# Altium PCB radxa_cm3_io_board_v1330.PcbDoc (part 4 of 8)
Units mil, origin at the board's own origin, x right, y up, seen from the top; angles counter-clockwise.
Board outline 6299.61 x 3544.09 mil, 4 copper layers (Top, GND, Power, Bottom), stack 35.4 mil thick; 547 components, 411 nets, 1952 pads, 2650 vias.
Unrouted connection lines stored in the file: 280.
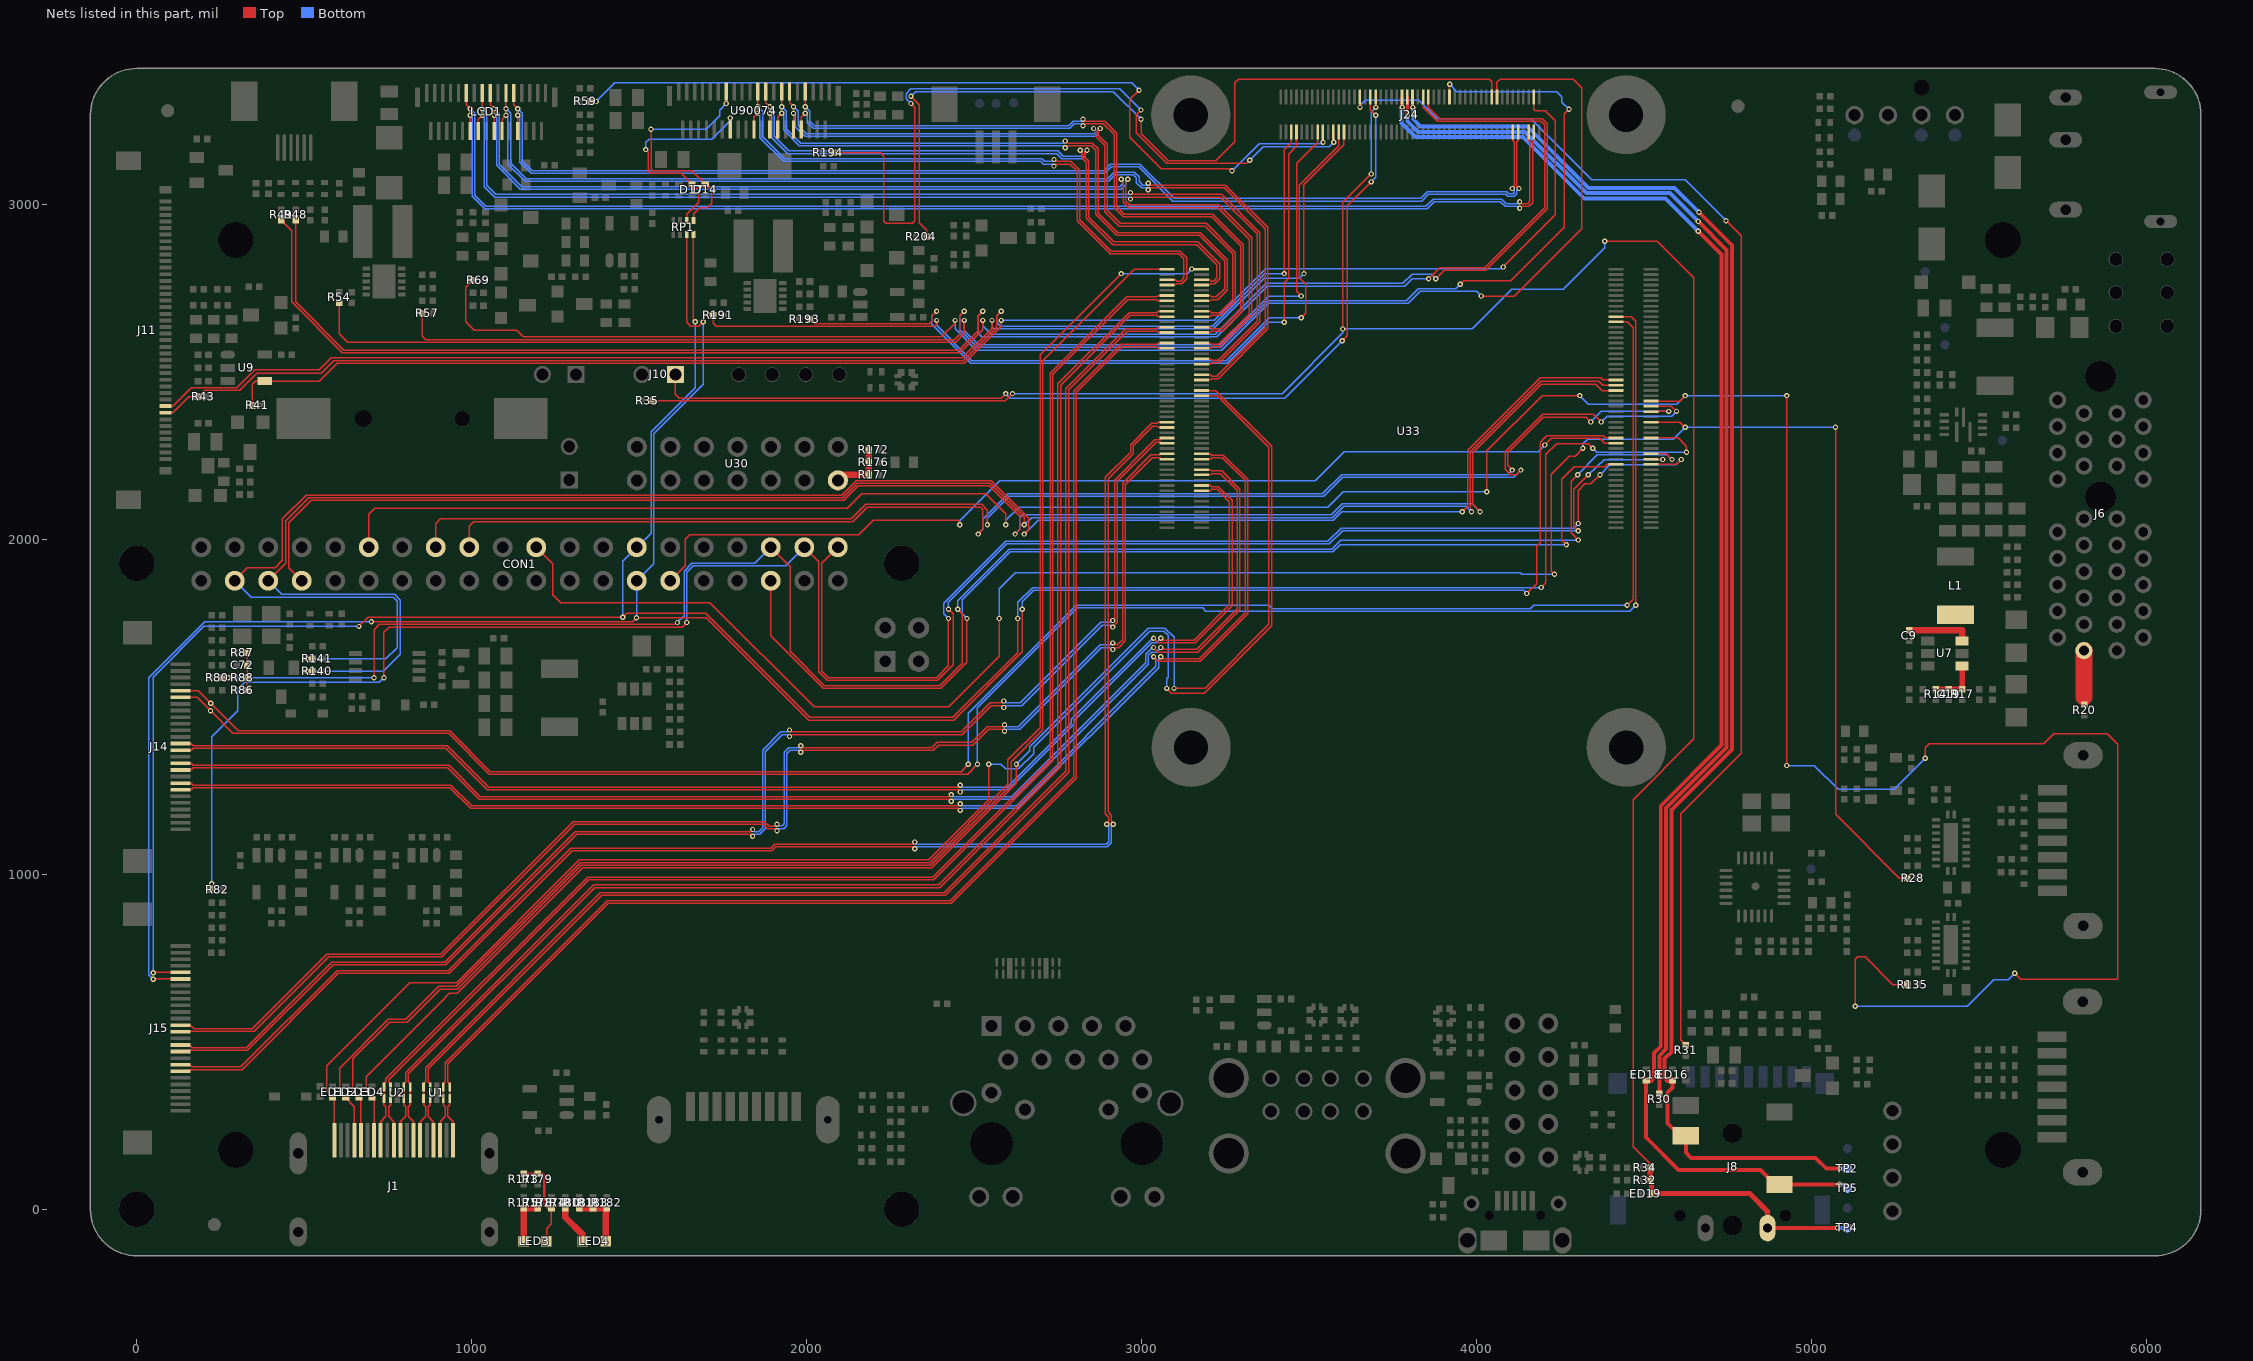
[diagram p6: the nets of this part, all layers, seen from the top]

## Via types
v1: diameter 15.75, hole 7.87, Top to Bottom, 2618 vias
v2: diameter 19.68, hole 11.81, Top to Bottom, 32 vias

## Nets (pads, with @x,y where several pads share a name; then routed paths per layer and width w, separated by ;. In a path a pad name is that pad's centre, name@x,y a point inside that pad or via, vN(x,y) a via of type N, cw(c..) or ccw(c..) an arc to the next point about the centre after c; other vN are vias at no path point) (continued)
HDMI_TX0N_PORT: J1.9 U2.2 U2.9 U33.184 | length 4093.4
  Top w3.94: J1.9@787.41,206.69 787.41,261.82 803.15,277.56 803.15,307.08 797.24,312.99 U2.9@797.24,331.21 U2.2@797.24,365.65 797.24,375 803.15,380.9 803.15,407.48 1364.17,968.5 2394.38,968.5 2750,1324.13 2750,2463.89 2962.68,2676.57 3045.28,2676.57 3049.21,2680.51 U33.184@3075.2,2680.51
HDMI_TX0P_PORT: J1.7 U2.1 U2.10 U33.182 | length 4080.4
  Top w3.94: J1.7@826.78,206.69 826.78,261.81 811.03,277.55 811.03,307.09 816.93,312.99 U2.10@816.93,331.21 U2.1@816.93,365.65 816.93,375 811.02,380.9 811.02,404.22 1367.43,960.63 2397.64,960.63 2757.87,1320.87 2757.87,2460.63 2965.94,2668.7 3045.28,2668.7 3049.21,2664.76 U33.182@3075.2,2664.76
HDMI_TX1N_PORT: J1.6 U1.5 U1.6 U33.178 | length 4024.8
  Top w3.94: J1.6@846.46,206.69 846.46,261.81 862.2,277.56 862.2,307.09 856.3,312.99 U1.6@856.3,331.21 U1.5@856.3,365.65 856.3,375 862.21,380.9 862.21,422.55 1384.54,944.88 2410.12,944.88 2773.62,1308.38 2773.62,2450.11 2952.84,2629.33 3045.28,2629.33 3049.21,2633.27 U33.178@3075.2,2633.27
HDMI_TX1P_PORT: J1.4 U1.4 U1.7 U33.176 | length 4011.7
  Top w3.94: J1.4@885.83,206.69 885.83,261.81 870.08,277.56 870.08,307.09 875.98,312.99 U1.7@875.99,331.21 U1.4@875.99,365.65 875.99,375 870.08,380.9 870.08,419.29 1387.8,937.01 2413.39,937.01 2781.5,1305.12 2781.5,2446.85 2956.1,2621.46 3045.28,2621.46 3049.21,2617.52 U33.176@3075.2,2617.52
HDMI_TX2N_PORT: J1.3 U1.2 U1.9 U33.172 | length 3960.9
  Top w3.94: J1.3@905.52,206.69 905.52,261.82 921.26,277.56 921.26,307.08 915.35,313 U1.9@915.35,331.21 U1.2@915.35,365.65 915.35,375 921.26,380.9 921.26,438.1 1404.42,921.26 2427.84,921.26 2797.24,1290.66 2797.24,2442.04 2937.29,2582.09 3045.28,2582.09 3049.21,2586.02 U33.172@3075.2,2586.02
HDMI_TX2P_PORT: J1.1 U1.1 U1.10 U33.170 | length 3947.9
  Top w3.94: J1.1@944.89,206.69 944.89,261.81 929.14,277.55 929.14,307.09 935.04,312.99 U1.10@935.04,331.21 U1.1@935.04,365.65 935.04,375 929.13,380.9 929.13,434.84 1407.68,913.39 2431.1,913.39 2805.12,1287.4 2805.12,2438.78 2940.55,2574.21 3045.28,2574.21 3049.21,2570.28 U33.170@3075.2,2570.28
HDMI_TX_CEC_PORT: ED4.1 J1.13 U33.151 | length 4526.3
  Top w3.94: J1.13@708.67,206.69 708.67,326.77 ED4.1@702.76,332.68 696.85,338.58 693.92,338.58 693.92,347.42 685.04,356.3 685.04,395.87 923.03,633.86 923.03,635.15 933.07,645.19 956.58,645.19 1331.08,1019.68 2374.02,1019.68 2625.98,1271.65 v1(2625.98,1328.74) ; v1(3096.46,1555.12) 3188.98,1555.12 3379.92,1746.06 3379.92,2274.3 3225.68,2428.54 U33.151@3179.13,2428.54
  Bottom w3.94: v1(2625.98,1328.74) 2665.88,1368.64 2665.88,1380.45 3019.69,1734.25 3069.32,1734.25 3096.46,1707.11 v1(3096.46,1555.12)
HDMI_TX_HPD_PORT: ED1.1 J1.19 U33.153 | length 4748.7
  Top w3.94: J1.19@590.56,206.69 590.56,326.77 ED1.1@584.65,332.68 578.74,338.58 575.81,338.58 575.81,347.42 566.93,356.3 566.93,429.13 814.96,677.17 955.06,677.17 1321.2,1043.31 2364.23,1043.31 2543.31,1222.38 v1(2543.31,1328.74) ; v1(3074.8,1555.12) 3088.58,1541.34 3187.01,1541.34 3387.8,1742.13 3387.8,2277.56 3221.06,2444.29 U33.153@3179.13,2444.29
  Bottom w3.94: v1(2543.31,1328.74) 2579.82,1328.74 2593.6,1314.96 2631.69,1314.96 2677.17,1360.43 2677.17,1379.92 3023.62,1726.38 3066.06,1726.38 3078.74,1713.69 3078.74,1588.58 3074.8,1584.64 v1(3074.8,1555.12)
HDMI_TXCLKN_PORT: J1.12 U2.5 U2.6 U33.190 | length 4170.1
  Top w3.94: J1.12@728.35,206.69 728.35,261.81 744.09,277.56 744.09,307.09 738.19,312.99 U2.6@738.19,331.21 U2.5@738.19,365.65 738.19,375 744.1,380.9 744.1,390.41 1345.81,992.13 2376.66,992.13 2726.38,1341.84 2726.38,2495.39 2954.81,2723.82 3045.28,2723.82 3049.21,2727.76 U33.190@3075.2,2727.76
HDMI_TXCLKP_PORT: J1.10 U2.4 U2.7 U33.188 | length 4157.1
  Top w3.94: J1.10@767.72,206.69 767.72,261.81 751.97,277.56 751.97,307.09 757.87,312.99 U2.7@757.88,331.21 U2.4@757.88,365.65 757.88,375 751.97,380.9 751.97,387.15 1349.08,984.25 2379.92,984.25 2734.25,1338.58 2734.25,2492.13 2958.07,2715.94 3045.28,2715.94 3049.21,2712.01 U33.188@3075.2,2712.01
HDMI_TXDDC_SCL_PORT: ED3.1 J1.15 U33.200 | length 4346.8
  Top w3.94: J1.15@669.3,206.69 669.3,326.77 ED3.1@663.39,332.68 657.48,338.58 654.55,338.58 654.55,347.42 645.67,356.3 645.67,449.91 754.81,559.06 807.09,559.06 905.51,657.48 957.71,657.48 1327.79,1027.56 2370.75,1027.56 2610.24,1267.04 2610.24,1336.5 2704.72,1430.99 2704.72,2533.27 2977.95,2806.5 U33.200@3075.2,2806.5
HDMI_TXDDC_SDA_PORT: ED2.1 J1.16 U33.199 | length 4490.8
  Top w3.94: J1.16@649.61,206.69 649.61,307.09 ED2.1@624.02,332.68 618.11,338.58 615.18,338.58 615.18,347.42 606.3,356.3 606.3,421.68 751.55,566.93 803.83,566.93 902.25,665.35 954.42,665.35 1324.5,1035.43 2367.49,1035.43 2600.39,1268.33 2600.39,1341.82 2696.85,1438.27 2696.85,2551.18 v1(2938.98,2793.31) ; v1(3149.61,2807.09) 3178.54,2807.09 U33.199@3179.13,2806.5
  Bottom w3.94: v1(2938.98,2793.31) 3135.83,2793.31 v1(3149.61,2807.09)
HP_DET_L_GPIO4_C4: J24.70 R31.2 | length 3846
  Top w3.94: J24.70@3650.98,3320.08 3651.57,3319.49 v1(3651.57,3289.37) ; R31.2@4624.02,490.16 4608.27,505.91 4608.27,1167.32 4608.27,1180.31 4789.37,1361.41 4789.37,2905.51 v1(4744.09,2950.79)
  Bottom w3.94: v1(3651.57,3289.37) 3651.57,3295.28 3667.32,3311.02 3826.77,3311.02 3881.89,3255.91 4160.63,3255.91 4343.7,3072.83 4622.05,3072.83 v1(4744.09,2950.79)
HP_SNS: J24.52 R30.2 | length 3786.9
  Top w7.87: J24.52@3792.72,3320.08 3793.31,3319.49 v1(3793.31,3265.75)
  Top w11.81: R30.2@4545.28,344.49 4545.28,458.66 4564.96,478.35 4564.96,1198.25 4746.06,1379.35 4746.06,2864.17 v1(4661.42,2948.82)
  Bottom w11.81: v1(3793.31,3265.75) 3793.31,3248.03 3824.8,3216.54 4144.32,3216.54 4327.39,3033.46 4576.77,3033.46 v1(4661.42,2948.82)
HPL_OUT: ED16.1 J8.3 J24.50 TP2.1 | length 4524.8
  Top w7.87: J24.50@3808.46,3320.08 3808.46,3305.12 v1(3809.06,3289.37)
  Top w11.81: v1(4663.39,2976.38) 4761.81,2877.95 4761.81,1372.83 4580.71,1191.73 4580.71,470.47 4561.02,450.79 4561.02,391.73 4568.9,383.86 ED16.1@4584.65,383.86 4584.65,364.17 4569.69,349.21 4569.69,257.09 4607.09,219.68 J8.3@4624.02,219.68 4624.02,169.29 4639.76,153.54 5011.81,153.54 5043.31,122.05 v1(5082.68,122.05)
  Bottom w11.81: v1(3809.06,3289.37) 3811.02,3287.4 3811.02,3253.94 3832.68,3232.28 4150.84,3232.28 4333.91,3049.21 4590.55,3049.21 v1(4663.39,2976.38) ; v1(5082.68,122.05) TP2.1@5106.3,122.05
HPR_OUT: ED18.1 J8.6 J24.54 TP5.1 | length 4597.8
  Top w7.87: J24.54@3776.97,3320.08 3776.97,3297.24 v1(3777.56,3289.37)
  Top w11.81: v1(4661.42,2919.29) 4730.31,2850.39 4730.31,1385.87 4549.21,1204.77 4549.21,486.22 4529.53,466.54 4529.53,391.73 4521.65,383.86 ED18.1@4505.91,383.86 4505.91,214.57 4602.36,118.11 4846.39,118.11 4889.76,74.02 J8.6@4903.54,74.02 4904.33,74.8 v1(5082.68,74.8)
  Bottom w11.81: v1(3777.56,3289.37) 3775.59,3287.4 3775.59,3242.13 3816.93,3200.79 4137.8,3200.79 4320.87,3017.72 4562.99,3017.72 v1(4661.42,2919.29) ; v1(5082.68,74.8) 5094.49,74.8 TP5.1@5106.3,62.99
I2C0_SCL_PMIC: J14.5 U33.80 | length 5614.5
  Top w3.94: J14.5@131.1,1548.04 184.25,1548.04 v1(221.46,1510.83) 303.15,1429.13 934.17,1429.13 1056.21,1307.09 2460.63,1307.09 v1(2482.28,1328.74) ; U33.80@4415.75,2649.02 4449.41,2649.02 4466.54,2631.89 4466.54,1820.87 v1(4448.82,1803.15)
  Bottom w3.94: v1(2482.28,1328.74) 2482.28,1481.41 2804.02,1803.15 3379.86,1803.15 3389.71,1793.31 4160.33,1793.31 4170.18,1803.15 v1(4448.82,1803.15)
I2C0_SDA_PMIC: J14.6 U33.82 | length 5666.4
  Top w3.94: J14.6@131.1,1528.35 180.32,1528.35 v1(220.47,1488.19) 287.4,1421.26 930.9,1421.26 1052.95,1299.21 2480.31,1299.21 v1(2509.84,1328.74) ; U33.82@4415.75,2664.76 4460.63,2664.76 4474.41,2650.98 v1(4474.41,1803.15)
  Bottom w3.94: v1(2509.84,1328.74) 2509.84,1497.83 2807.28,1795.28 3181.83,1795.28 3191.68,1785.43 4456.69,1785.43 v1(4474.41,1803.15)
I2C2_SCL_LCD: D14.1 RP1.4 U90074.27 | length 754.3
  Top w3.94: v1(1535.43,3224.41) 1535.43,3104.33 1539.37,3100.39 1657.48,3100.39 D14.1@1696.85,3061.02 1716.54,3041.34 1716.54,3003.94 1702.76,2990.16 1681.1,2990.16 1663.39,2972.44 1663.39,2953.1 RP1.4@1661.89,2951.6 ; v1(1759.84,3301.18) U90074.27@1759.84,3336.61
  Bottom w3.94: v1(1535.43,3224.41) 1700.79,3224.41 1740.16,3263.78 1740.16,3281.5 v1(1759.84,3301.18)
I2C2_SCL_M1: CON1.28 J15.5 RP1.5 U33.35 | length 7781.7
  Top w3.94: v1(49.21,706.69) 50,707.48 J15.5@131.1,707.48 ; v1(663.39,1740.16) 690.94,1767.72 v1(1450.79,1767.72) 1462.6,1779.53 1698.14,1779.53 2009.17,1468.5 2436.39,1468.5 2629.92,1662.03 v1(2629.92,1763.78) ; RP1.5@1661.89,2910.6 1661.89,2653.54 1667.32,2648.11 v1(1667.32,2649.61) ; v1(4192.91,1856.3) 4206.69,1870.08 4206.69,2253.94 4238.19,2285.43 4332.68,2285.43 v1(4346.46,2271.65) ; U33.35@4520.47,2302.56 4600.98,2302.56 4625.98,2277.56 v1(4625.98,2259.84)
  Bottom w3.94: v1(49.21,706.69) 49.21,1588.58 200.79,1740.16 v1(663.39,1740.16) ; v1(1450.79,1767.72) 1450.79,1934.25 CON1.28@1492.91,1976.38 1535.43,2018.9 1535.43,2320.87 1667.32,2452.76 v1(1667.32,2649.61) ; v1(2629.92,1763.78) 2629.92,1811.7 2674.52,1856.3 v1(4192.91,1856.3) ; v1(4346.46,2271.65) 4358.27,2259.84 v1(4625.98,2259.84)
I2C2_SCL_MO: CON1.5 R140.1 U33.56 | length 5484.7
  Top w3.94: CON1.5@392.91,1876.38 444.88,1928.35 444.88,2055.12 513.78,2124.02 2107.59,2124.02 2150.9,2167.32 2547.92,2167.32 2649.61,2065.64 v1(2649.61,2043.31) ; v1(507.87,1606.3) R140.1@523.62,1606.3 ; v1(3984.25,2082.68) 3980.31,2086.61 3980.31,2261.81 4190.94,2472.44 4363.58,2472.44 4375.98,2460.04 U33.56@4415.75,2460.04
  Bottom w3.94: CON1.5@392.91,1876.38 432.68,1836.61 769.69,1836.61 787.4,1818.9 787.4,1657.48 736.22,1606.3 v1(507.87,1606.3) ; v1(2649.61,2043.31) 2671.26,2064.96 3568.96,2064.96 3602.42,2098.43 3968.5,2098.43 v1(3984.25,2082.68)
I2C2_SDA_LCD: D17.1 RP1.3 U90074.26 | length 688.7
  Top w3.94: v1(1519.69,3163.39) 1527.56,3155.51 1527.56,3098.43 1533.46,3092.52 1625.98,3092.52 D17.1@1657.48,3061.02 1677.17,3041.34 1677.17,3005.91 1641.89,2970.63 RP1.3@1641.89,2951.6 ; U90074.26@1771.65,3223.43 v1(1771.65,3257.87)
  Bottom w3.94: v1(1519.69,3163.39) 1519.69,3185.04 1529.53,3194.88 1716.54,3194.88 1771.65,3250 v1(1771.65,3257.87)
I2C2_SDA_M1: CON1.27 J15.6 RP1.6 U33.36 | length 7548.3
  Top w3.94: v1(49.21,687.01) 50,687.79 J15.6@131.1,687.79 ; v1(700.79,1753.94) 1480.31,1753.94 v1(1492.13,1765.75) 1700.79,1765.75 2005.91,1460.63 2439.65,1460.63 2643.7,1664.68 v1(2643.7,1791.34) ; RP1.6@1641.89,2910.6 1641.89,2647.48 1653.54,2635.83 1677.17,2635.83 v1(1690.94,2649.61) ; v1(4149.61,1838.58) 4179.13,1868.11 4179.13,1980.31 4188.98,1990.16 4188.98,2289.37 4208.66,2309.06 4377.36,2309.06 4383.86,2302.56 U33.36@4415.75,2302.56
  Bottom w3.94: v1(49.21,687.01) 35.43,700.79 35.43,1586.61 202.76,1753.94 v1(700.79,1753.94) ; v1(1492.13,1765.75) 1492.91,1766.54 CON1.27@1492.91,1876.38 1543.31,1926.77 1543.31,2314.96 1690.94,2462.6 v1(1690.94,2649.61) ; v1(2643.7,1791.34) 2643.7,1814.34 2677.78,1848.43 4139.76,1848.43 v1(4149.61,1838.58)
I2C2_SDA_MO: CON1.3 R141.1 U33.58 | length 5674.3
  Top w3.94: CON1.3@292.91,1876.38 292.91,1877.56 330.71,1915.35 413.39,1915.35 435.04,1937.01 435.04,2061.02 505.91,2131.89 2104.33,2131.89 2133.86,2161.42 2147.64,2175.2 2551.18,2175.2 2663.39,2062.99 2663.39,2029.53 v1(2649.61,2015.75) ; v1(507.87,1643.7) R141.1@523.62,1643.7 ; v1(3956.69,2082.68) 3972.44,2098.43 3972.44,2265.75 4188.98,2482.28 4370.08,2482.28 4376.57,2475.79 U33.58@4415.75,2475.79
  Bottom w3.94: CON1.3@292.91,1876.38 342.52,1826.77 765.75,1826.77 777.56,1814.96 777.56,1677.17 744.09,1643.7 v1(507.87,1643.7) ; v1(2649.61,2015.75) 2690.94,2057.09 3572.22,2057.09 3597.81,2082.68 v1(3956.69,2082.68)
I2C3_SCL_TP: J24.44 R49.1 | length 4976.4
  Top w3.94: R49.1@431.1,2952.76 462.6,2921.26 462.6,2708.66 614.17,2557.09 2457.43,2557.09 2525.59,2625.25 v1(2525.59,2653.54) ; J24.44@3855.71,3320.08 3855.71,3289.96 3889.76,3255.91 4194.94,3255.91 4210.63,3240.22 4210.63,2990.83 4210.63,2986.9 4026.88,2803.15 3903.54,2803.15 v1(3877.95,2777.56)
  Bottom w3.94: v1(2525.59,2653.54) 2525.59,2637.8 2551.18,2612.2 3220.03,2612.2 3371.6,2763.78 3779.53,2763.78 3807.09,2791.34 3864.17,2791.34 v1(3877.95,2777.56)
I2C3_SDA_TP: J24.46 R48.1 | length 5017.6
  Top w3.94: R48.1@474.41,2952.76 474.41,2708.66 618.11,2564.96 2454.16,2564.96 2511.81,2622.61 2511.81,2667.32 v1(2525.59,2681.1) ; J24.46@3839.96,3320.08 3839.96,3289.96 3881.89,3248.03 4191.68,3248.03 4202.76,3236.95 4202.76,2990.16 4023.62,2811.02 3889.76,2811.02 v1(3856.3,2777.56)
  Bottom w3.94: v1(2525.59,2681.1) 2511.81,2667.32 2511.81,2615.29 2522.77,2604.33 3223.29,2604.33 3374.87,2755.91 3785.43,2755.91 3807.09,2777.56 v1(3856.3,2777.56)
I2S1_LRCK_RX_M1: CON1.36 R80.2 U33.29 | length 5592.8
  Top w3.94: R80.2@255.91,1586.61 v1(273.62,1586.61) ; v1(708.66,1586.61) 708.66,1730.31 724.41,1746.06 1608.27,1746.06 v1(1614.17,1751.97) ; CON1.36@1892.91,1976.38 1950.79,1918.5 1950.79,1665.35 2053.15,1562.99 2397.25,1562.99 2464.57,1630.31 2464.57,1777.56 v1(2450.79,1791.34) ; v1(4301.18,2192.91) 4281.5,2173.23 4281.5,2019.68 v1(4303.15,1998.03) ; U33.29@4520.47,2255.31 4565.55,2255.31 v1(4582.68,2238.19)
  Bottom w3.94: v1(273.62,1586.61) v1(708.66,1586.61) ; v1(1614.17,1751.97) 1633.86,1771.65 1633.86,1905.51 1657.48,1929.13 1845.67,1929.13 CON1.36@1892.91,1976.38 ; v1(2450.79,1791.34) 2450.79,1816.99 2604.27,1970.47 3566.93,1970.47 3594.49,1998.03 v1(4303.15,1998.03) ; v1(4301.18,2192.91) 4360.24,2251.97 4568.9,2251.97 v1(4582.68,2238.19)
I2S1_LRCK_TX_M1: CON1.35 U33.26 | length 3291.6
  Top w3.94: CON1.35@1892.91,1876.38 1892.91,1712.09 2049.89,1555.12 2400.51,1555.12 2478.35,1632.95 v1(2478.35,1763.78) ; v1(4267.72,1984.25) 4253.94,1998.03 4253.94,2179.13 4291.34,2216.54 4382.48,2216.54 4389.76,2223.82 U33.26@4415.75,2223.82
  Bottom w3.94: v1(2478.35,1763.78) 2464.57,1777.56 2464.57,1819.63 2607.53,1962.6 3570.87,1962.6 3592.52,1984.25 v1(4267.72,1984.25)
I2S1_MCLK_M1: CON1.22 R28.2 U33.41 | length 6350.2
  Top w3.94: CON1.22@1192.91,1976.38 1242.13,1927.17 1242.13,1834.65 1265.75,1811.02 1711.19,1811.02 2022.21,1500 2423.34,1500 2574.8,1651.46 v1(2574.8,1763.78) ; v1(4232.28,1895.67) 4222.44,1905.51 4222.44,2194.88 4275.59,2248.03 4293.31,2248.03 v1(4316.93,2271.65) ; U33.41@4520.47,2349.8 4606.3,2349.8 4621.46,2334.65 v1(4622.05,2334.65) ; v1(5070.87,2334.65) 5070.87,1179.13 5261.81,988.19 R28.2@5285.43,988.19
  Bottom w3.94: v1(2574.8,1763.78) 2574.8,1851.92 2622.49,1899.61 4129.92,1899.61 4133.86,1895.67 v1(4232.28,1895.67) ; v1(4316.93,2271.65) 4316.93,2285.43 4330.71,2299.21 4586.61,2299.21 v1(4622.05,2334.65) v1(5070.87,2334.65)
I2S1_SCLK_TX_M1: CON1.12 R135.2 U33.49 | length 8869.1
  Top w3.94: CON1.12@692.91,1976.38 692.91,2074.8 710.63,2092.52 2120.64,2092.52 2163.95,2135.83 2534.87,2135.83 2594.49,2076.21 v1(2594.49,2043.31) ; v1(4029.53,2141.73) 4029.53,2263.78 4194.88,2429.13 v1(4307.09,2429.13) ; U33.49@4520.47,2412.8 4605.71,2412.8 v1(4622.05,2429.13) ; v1(4925.2,1324.8) v1(4925.2,2429.13) ; v1(5129.92,606.3) 5129.92,746.06 5137.8,753.94 5159.45,753.94 5242.13,671.26 R135.2@5285.43,671.26 ; v1(5338.58,1346.46) 5338.58,1377.95 5350.39,1389.76 5692.91,1389.76 5722.44,1419.29 5881.89,1419.29 5913.39,1387.8 5913.39,687.01 5624.02,687.01 v1(5606.3,704.72)
  Bottom w3.94: v1(2594.49,2043.31) 2594.49,2056.47 2634.48,2096.46 3555.91,2096.46 3601.19,2141.73 v1(4029.53,2141.73) ; v1(4307.09,2429.13) 4332.68,2403.54 4596.46,2403.54 v1(4622.05,2429.13) v1(4925.2,2429.13) ; v1(4925.2,1324.8) 5007.87,1324.8 5078.74,1253.94 5246.06,1253.94 v1(5338.58,1346.46) ; v1(5129.92,606.3) 5464.57,606.3 5543.31,685.04 5586.61,685.04 v1(5606.3,704.72)
I2S1_SDI0_M1: CON1.38 R82.2 U33.27 | length 6112
  Top w3.94: R82.2@224.41,954.72 v1(224.41,972.44) ; v1(738.19,1586.61) 738.19,1722.44 753.94,1738.19 1627.95,1738.19 v1(1641.73,1751.97) ; CON1.38@1992.91,1976.38 2035.43,1933.86 2035.43,1605.01 2061.7,1578.74 2390.73,1578.74 2437.01,1625.02 2437.01,1777.56 v1(2423.23,1791.34) ; v1(4303.15,2025.59) 4289.37,2039.37 4289.37,2149.61 v1(4332.68,2192.91) ; U33.27@4520.47,2239.57 4521.06,2238.19 v1(4555.12,2238.19)
  Bottom w3.94: v1(224.41,972.44) 224.41,1411.42 301.18,1488.19 301.18,1551.18 322.83,1572.83 724.41,1572.83 v1(738.19,1586.61) ; v1(1641.73,1751.97) 1641.73,1901.57 1661.42,1921.26 1937.8,1921.26 CON1.38@1992.91,1976.38 ; v1(2423.23,1791.34) 2423.23,1811.7 2597.75,1986.22 3560.41,1986.22 3599.78,2025.59 v1(4303.15,2025.59) ; v1(4332.68,2192.91) 4379.92,2238.19 v1(4555.12,2238.19)
I2S1_SDI1_M1: CON1.18 U33.45 | length 4045.9
  Top w3.94: CON1.18@992.91,1976.38 992.91,2039.37 1006.69,2053.15 2136.95,2053.15 2180.25,2096.46 2518.57,2096.46 2525.59,2089.43 2525.59,2029.53 v1(2511.81,2015.75) ; v1(4106.3,2206.69) 4092.52,2220.47 4092.52,2257.87 4198.82,2364.17 4326.77,2364.17 v1(4340.55,2350.39) ; U33.45@4520.47,2381.3 4521.06,2381.89 v1(4572.83,2381.89)
  Bottom w3.94: v1(2511.81,2015.75) 2525.59,2029.53 2525.59,2060.46 2600.95,2135.83 3539.6,2135.83 3596.69,2192.91 4092.52,2192.91 v1(4106.3,2206.69) ; v1(4340.55,2350.39) 4372.05,2381.89 v1(4572.83,2381.89)
I2S1_SDI2_M1: CON1.16 U33.47 | length 4239.1
  Top w3.94: CON1.16@892.91,1976.38 892.91,2047.24 906.69,2061.02 2133.68,2061.02 2176.99,2104.33 2521.83,2104.33 2539.37,2086.79 v1(2539.37,2043.31) ; v1(4131.89,2206.69) 4118.11,2192.91 4100.39,2192.91 4084.65,2208.66 4084.65,2261.14 4197.53,2374.02 4348.43,2374.02 v1(4372.05,2350.39) ; U33.47@4520.47,2397.05 4581.3,2397.05 v1(4596.46,2381.89)
  Bottom w3.94: v1(2539.37,2043.31) 2539.37,2063.11 2604.21,2127.95 3542.86,2127.95 3599.95,2185.04 4110.24,2185.04 v1(4131.89,2206.69) ; v1(4372.05,2350.39) 4389.76,2368.11 4582.68,2368.11 v1(4596.46,2381.89)
I2S1_SDI3_M1: CON1.7 U33.54 | length 4671
  Top w3.94: CON1.7@492.91,1876.38 454.72,1914.57 454.72,2049.21 521.65,2116.14 2110.85,2116.14 2154.16,2159.45 2544.66,2159.45 2635.83,2068.28 2635.83,2029.53 v1(2622.05,2015.75) ; v1(4009.84,2082.68) 3988.19,2104.33 3988.19,2257.87 4192.91,2462.6 4355.71,2462.6 4374.02,2444.29 U33.54@4415.75,2444.29
  Bottom w3.94: v1(2622.05,2015.75) 2635.83,2029.53 2635.83,2064.4 2644.26,2072.83 3565.69,2072.83 3599.16,2106.3 3986.22,2106.3 v1(4009.84,2082.68)
I2S1_SDO0_M1: CON1.40 U33.25 | length 3515
  Top w3.94: CON1.40@2092.91,1976.38 2045.28,1928.74 2045.28,1606.3 2064.96,1586.61 2387.47,1586.61 2423.23,1622.38 v1(2423.23,1763.78) ; v1(4303.15,2047.24) 4303.15,2145.67 4322.83,2165.35 4340.55,2165.35 v1(4368.11,2192.91) ; U33.25@4520.47,2223.82 4595.87,2223.82 v1(4610.24,2238.19)
  Bottom w3.94: v1(2423.23,1763.78) 2409.45,1777.56 2409.45,1809.06 2594.49,1994.09 3555.85,1994.09 3595.22,2033.46 4289.37,2033.46 v1(4303.15,2047.24) ; v1(4368.11,2192.91) 4397.64,2222.44 4594.49,2222.44 v1(4610.24,2238.19)
I2S1_SDO2_M1: CON1.29 U33.34 | length 3074.2
  Top w3.94: CON1.29@1592.91,1876.38 1637.8,1921.26 1637.8,2000 1651.57,2013.78 2155.51,2013.78 2198.82,2057.09 2451.46,2057.09 2456.69,2051.86 v1(2456.69,2043.31) ; v1(4202.76,2281.5) 4222.44,2301.18 4367.52,2301.18 4381.89,2286.81 U33.34@4415.75,2286.81
  Bottom w3.94: v1(2456.69,2043.31) 2456.69,2055.12 2576.77,2175.2 3517.72,2175.2 3604.33,2261.81 4183.07,2261.81 v1(4202.76,2281.5)
LCD0_BL_EN: J11.32 J24.75 | length 4080.9
  Top w3.94: J11.32@86.61,2397.64 108.27,2397.64 163.39,2452.76 299.21,2452.76 352.36,2505.91 545.28,2505.91 580.71,2541.34 2463.95,2541.34 2553.15,2630.54 v1(2553.15,2653.54) ; v1(3484.25,2793.31) 3484.25,3059.06 3603.74,3178.54 J24.75@3603.74,3216.14
  Bottom w3.94: v1(2553.15,2653.54) 2553.15,2632.51 2557.7,2627.95 3213.51,2627.95 3365.08,2779.53 3470.47,2779.53 v1(3484.25,2793.31)
LCD0_BL_PWM5: J11.33 J24.95 R43.1 | length 4038.8
  Top w3.94: J11.33@86.61,2377.95 108.27,2377.95 155.51,2425.2 R43.1@183.07,2425.2 202.76,2444.88 307.09,2444.88 358.27,2496.06 551.18,2496.06 588.58,2533.46 2467.21,2533.46 2566.93,2633.18 2566.93,2667.32 v1(2580.71,2681.1) ; v1(3425.2,2793.31) 3425.2,3163.39 3446.26,3184.45 J24.95@3446.26,3216.14
  Bottom w3.94: v1(2580.71,2681.1) 2566.93,2667.32 2566.93,2647.64 2578.74,2635.83 3210.24,2635.83 3367.72,2793.31 v1(3425.2,2793.31)
LCD1_PWREN_H: J24.4 R41.1 U9.4 | length 4568.2
  Top w3.94: R41.1@344.49,2399.61 344.49,2462.6 354.33,2472.44 U9.4@381.89,2472.44 545.28,2472.44 598.43,2525.59 2470.47,2525.59 2580.71,2635.83 v1(2580.71,2653.54) ; v1(4078.74,2812.99) 4234.25,2968.5 4234.25,3250 4204.72,3279.53 4174.61,3279.53 4170.67,3283.46 J24.4@4170.67,3320.08
  Bottom w3.94: v1(2580.71,2653.54) 3216.83,2653.54 3370.37,2807.09 4072.83,2807.09 v1(4078.74,2812.99)
MCLK: C72.1 R86.1 R87.2 R88.1 | length 112.2
  Top w3.94: R86.1@330.71,1549.21 R88.1@330.71,1586.61 C72.1@330.71,1624.02 R87.2@330.71,1661.42
MIC1_IN: ED19.1 J8.5 J24.64 R32.2 R34.1 R35.2 TP4.1 | length 7590.4
  Top w3.94: R35.2@1539.37,2413.39 2592.52,2413.39 v1(2614.17,2435.04) ; v1(3600.39,2627.95) 3600.39,3005.91 v1(3685.04,3090.55) ; J24.64@3698.23,3320.08 3698.82,3319.49 v1(3698.82,3289.37) ; v1(4381.89,2889.76) 4538.08,2889.76 4647.64,2780.2 4647.64,1404.3 4466.54,1223.2 4466.54,187.01 4517.72,135.83 R34.1@4517.72,124.02
  Top w11.81: J8.5@4868.11,-55.91 4868.9,-55.12 v1(5076.77,-55.12)
  Top w15.75: R34.1@4517.72,124.02 R32.2@4517.72,86.61 4521.65,82.68 ED19.1@4521.65,47.24 4814.96,47.24 4868.11,-5.91 J8.5@4868.11,-55.91
  Bottom w3.94: v1(2614.17,2435.04) 3419.29,2435.04 3600.39,2616.14 v1(3600.39,2627.95) 3986.22,2627.95 4104.33,2746.06 4257.87,2746.06 4381.89,2870.08 v1(4381.89,2889.76) ; v1(3685.04,3090.55) 3685.04,3275.59 v1(3698.82,3289.37)
  Bottom w11.81: v1(5076.77,-55.12) TP4.1@5106.3,-55.12
MIC2_IN: J10.1 J24.66 | length 2912.7
  Top w3.94: J10.1@1608.27,2492.13 1608.27,2433.07 1620.08,2421.26 2580.71,2421.26 v1(2594.49,2435.04) ; v1(3598.43,2592.52) 3614.17,2608.27 3614.17,2996.06 v1(3685.04,3066.93) ; J24.66@3682.48,3320.08 3682.48,3281.5 3683.07,3281.5 v1(3698.82,3265.75)
  Bottom w3.94: v1(2594.49,2435.04) 2608.27,2421.26 3427.17,2421.26 v1(3598.43,2592.52) ; v1(3685.04,3066.93) 3698.82,3080.71 v1(3698.82,3265.75)
MIPI_BL_EN_1: J24.85 R54.1 | length 3654.4
  Top w3.94: R54.1@604.33,2706.69 604.33,2614.17 629.92,2588.58 2444.38,2588.58 2470.47,2614.67 v1(2470.47,2653.54) ; v1(3476.38,2726.38) 3462.6,2740.16 3462.6,3122.64 3525,3185.04 J24.85@3525,3216.14
  Bottom w3.94: v1(2470.47,2653.54) 2470.47,2623.22 2512.99,2580.71 3233.07,2580.71 3378.74,2726.38 v1(3476.38,2726.38)
MIPI_BL_EN_2: J24.77 R191.1 | length 2526.3
  Top w3.94: R191.1@1720.47,2669.29 1720.47,2645.67 1730.31,2635.83 2381.89,2635.83 2387.8,2641.73 v1(2387.8,2653.54) ; v1(3476.38,2661.42) 3490.16,2675.2 3490.16,2761.81 3470.47,2781.5 3470.47,3057.09 3587.99,3174.61 J24.77@3587.99,3216.14
  Bottom w3.94: v1(2387.8,2653.54) 2387.8,2639.09 2493.42,2533.46 3252.64,2533.46 3380.6,2661.42 v1(3476.38,2661.42)
MIPI_CSI_RX_CLK0N: J14.20 U33.127 | length 4026.9
  Top w3.94: J14.20@131.1,1252.76 163.39,1252.76 169.29,1258.66 935.04,1258.66 996.85,1196.85 2452.76,1196.85 v1(2458.66,1190.94) ; v1(3057.09,1649.61) 3062.99,1643.7 3171.94,1643.7 3309.06,1780.82 3309.06,2175.84 3240.83,2243.5 3208.66,2243.5 3204.72,2239.57 U33.127@3179.13,2239.57
  Bottom w3.94: v1(2458.66,1190.94) 2464.57,1196.85 2629.58,1196.85 3050.2,1617.46 3050.2,1642.72 v1(3057.09,1649.61)
MIPI_CSI_RX_CLK0P: J14.19 U33.129 | length 4064.9
  Top w3.94: J14.19@131.1,1272.45 163.39,1272.45 169.29,1266.54 938.3,1266.54 1000.11,1204.72 2452.76,1204.72 v1(2458.66,1210.63) ; v1(3035.43,1649.61) 3049.21,1635.83 3175.2,1635.83 3316.93,1777.56 3316.93,2179.13 3244.09,2251.38 3208.66,2251.38 3204.72,2255.31 U33.129@3179.13,2255.31
  Bottom w3.94: v1(2458.66,1210.63) 2464.57,1204.72 2626.32,1204.72 3042.32,1620.73 3042.32,1642.72 v1(3035.43,1649.61)
MIPI_CSI_RX_CLK1N: J15.20 U33.140 | length 4417.4
  Top w3.94: J15.20@131.1,412.2 143.7,412.2 146.85,415.35 159.45,415.35 161.42,417.32 198.82,417.32 198.92,417.22 314.86,417.22 602.36,704.72 933.54,704.72 1299.68,1070.87 1895.61,1070.87 1907.42,1082.68 2316.93,1082.68 v1(2322.83,1076.77) ; v1(2915.35,1149.61) 2909.45,1155.51 2909.45,1177.17 2899.61,1187.01 2899.61,2181.1 2974.41,2255.91 2974.41,2279.27 3033.13,2337.99 3045.28,2337.99 3049.21,2334.06 U33.140@3075.2,2334.06
  Bottom w3.94: v1(2322.83,1076.77) 2328.74,1082.68 2897.64,1082.68 2909.45,1094.49 2909.45,1143.7 v1(2915.35,1149.61)
MIPI_CSI_RX_CLK1P: J15.19 U33.142 | length 4418.7
  Top w3.94: J15.19@131.1,431.89 158.66,431.89 165.35,425.2 311.02,425.2 598.43,712.6 930.28,712.6 1078.72,861.04 1078.72,862.18 1295.28,1078.74 1892.35,1078.74 1904.16,1090.55 2316.93,1090.55 v1(2322.83,1096.46) ; v1(2895.67,1149.61) 2901.58,1155.51 2901.58,1171.26 2891.73,1181.1 2891.73,2185.04 2966.54,2259.84 2966.54,2282.54 3029.87,2345.87 3045.28,2345.87 3049.21,2349.8 U33.142@3075.2,2349.8
  Bottom w3.94: v1(2322.83,1096.46) 2328.74,1090.55 2894.38,1090.55 2901.57,1097.75 2901.57,1143.7 v1(2895.67,1149.61)
MIPI_CSI_RX_D0N: J14.14 U33.115 | length 3837.7
  Top w3.94: J14.14@131.1,1370.87 163.39,1370.87 169.29,1376.77 922.44,1376.77 1047.24,1251.97 2452.76,1251.97 v1(2458.66,1246.06) ; v1(3057.09,1704.72) 3062.99,1698.82 3156.19,1698.82 3261.81,1804.44 3261.81,2112.81 3225.09,2149.02 3208.66,2149.02 3204.72,2145.08 U33.115@3179.13,2145.08
  Bottom w3.94: v1(2458.66,1246.06) 2464.57,1251.97 2602.11,1251.97 2797.86,1447.72 2797.86,1459.08 3029.73,1690.94 3043.31,1690.94 v1(3057.09,1704.72)
MIPI_CSI_RX_D0P: J14.13 U33.117 | length 3864.6
  Top w3.94: J14.13@131.1,1390.56 163.39,1390.56 169.29,1384.65 926.38,1384.65 1051.18,1259.84 2452.76,1259.84 v1(2458.66,1265.75) ; v1(3035.43,1704.72) 3049.21,1690.94 3159.45,1690.94 3269.69,1801.18 3269.69,2116.14 3228.35,2156.89 3208.66,2156.89 3204.72,2160.83 U33.117@3179.13,2160.83
  Bottom w3.94: v1(2458.66,1265.75) 2464.57,1259.84 2598.84,1259.84 2789.99,1450.99 2789.99,1462.34 3026.46,1698.82 3027.42,1698.82 3034.38,1705.78 v1(3035.43,1704.72)
MIPI_CSI_RX_D1N: J14.17 U33.121 | length 3937.5
  Top w3.94: J14.17@131.1,1311.82 163.39,1311.82 169.29,1317.72 929.13,1317.72 1022.44,1224.41 2425.2,1224.41 v1(2431.1,1218.5) ; v1(3057.09,1677.17) 3062.99,1671.26 3164.06,1671.26 3285.43,1792.63 3285.43,2146.1 3234.69,2196.26 3208.66,2196.26 3204.72,2192.32 U33.121@3179.13,2192.32
  Bottom w3.94: v1(2431.1,1218.5) 2437.01,1224.41 2616.14,1224.41 3019.69,1627.95 3019.69,1653.35 3029.73,1663.39 3043.31,1663.39 v1(3057.09,1677.17)
MIPI_CSI_RX_D1P: J14.16 U33.123 | length 3965.6
  Top w3.94: J14.16@131.1,1331.5 163.39,1331.5 169.29,1325.59 932.4,1325.59 1025.7,1232.28 2425.2,1232.28 v1(2431.1,1238.19) ; v1(3035.43,1677.17) 3035.43,1675.2 3047.24,1663.39 3167.32,1663.39 3293.31,1789.37 3293.31,2150.04 3238.58,2204.13 3208.66,2204.13 3204.72,2208.07 U33.123@3179.13,2208.07
  Bottom w3.94: v1(2431.1,1238.19) 2437.01,1232.28 2612.2,1232.28 3011.81,1631.89 3011.81,1656.61 3026.46,1671.26 3027.42,1671.26 3034.38,1678.22 v1(3035.43,1677.17)
MIPI_CSI_RX_D2N: J15.14 U33.128 | length 4085.6
  Top w3.94: J15.14@131.1,530.31 155.51,530.31 156.69,531.5 350.39,531.5 572.83,753.94 911.42,753.94 1307.09,1149.61 1870.08,1149.61 1883.86,1135.83 1905.51,1135.83 v1(1911.42,1129.92) ; v1(1982.28,1364.17) 1988.19,1370.08 2377.95,1370.08 2393.7,1385.83 2496.26,1385.83 2543.5,1433.07 2584.65,1433.07 v1(2590.55,1427.17) ; v1(2913.39,1671.26) 2919.29,1677.17 2931.1,1677.17 2950.79,1696.85 2950.79,2163.39 3031.3,2243.9 3053.15,2243.9 3057.48,2239.57 U33.128@3075.2,2239.57
  Bottom w3.94: v1(1911.42,1129.92) 1917.32,1135.83 1931.1,1135.83 1940.94,1145.67 1940.94,1360.24 1950.79,1370.08 1976.38,1370.08 v1(1982.28,1364.17) ; v1(2590.55,1427.17) 2596.46,1433.07 2635.83,1433.07 2879.92,1677.17 2907.48,1677.17 v1(2913.39,1671.26)
MIPI_CSI_RX_D2P: J15.13 U33.130 | length 4086.4
  Top w3.94: J15.13@131.1,550 160.63,550 171.26,539.37 344.49,539.37 566.93,761.81 907.48,761.81 1303.15,1157.48 1874.02,1157.48 1887.8,1143.7 1905.51,1143.7 v1(1911.42,1149.61) ; v1(1982.28,1383.86) 1988.19,1377.95 2374.02,1377.95 2389.76,1393.7 2492.13,1393.7 2539.37,1440.94 2584.65,1440.94 v1(2590.55,1446.85) ; v1(2913.39,1690.94) 2919.29,1685.04 2927.17,1685.04 2942.91,1700.79 2942.91,2167.32 3027.56,2251.97 3053.15,2251.97 3056.5,2255.31 U33.130@3075.2,2255.31
  Bottom w3.94: v1(1911.42,1149.61) 1915.35,1145.67 1927.17,1145.67 1933.07,1151.57 1933.07,1364.17 1946.85,1377.95 1976.38,1377.95 v1(1982.28,1383.86) ; v1(2590.55,1446.85) 2596.46,1440.94 2631.89,1440.94 2875.98,1685.04 2907.48,1685.04 v1(2913.39,1690.94)
MIPI_CSI_RX_D3N: J15.17 U33.134 | length 4099.5
  Top w3.94: J15.17@131.1,471.26 153.54,471.26 156.69,474.41 330.71,474.41 586.61,730.31 923.23,730.31 1312.99,1120.08 1832.68,1120.08 v1(1838.58,1114.17) ; v1(1948.82,1411.42) 1954.72,1417.32 2464.57,1417.32 2551.18,1503.94 2582.68,1503.94 v1(2588.58,1498.03) ; v1(2913.39,1738.19) 2927.17,1751.97 2927.17,2173.23 3043.31,2289.37 3059.11,2289.37 3061.67,2286.81 U33.134@3075.2,2286.81
  Bottom w3.94: v1(1838.58,1114.17) 1844.49,1120.08 1860.24,1120.08 1875.98,1135.83 1875.98,1366.14 1927.17,1417.32 1942.91,1417.32 v1(1948.82,1411.42) ; v1(2588.58,1498.03) 2594.49,1503.94 2641.73,1503.94 2881.89,1744.09 2907.48,1744.09 v1(2913.39,1738.19)
MIPI_CSI_RX_D3P: J15.16 U33.136 | length 4093.5
  Top w3.94: J15.16@131.1,490.94 156.69,490.94 165.35,482.28 326.77,482.28 582.68,738.19 919.29,738.19 1309.06,1127.95 1832.68,1127.95 v1(1838.58,1133.86) ; v1(1948.82,1431.1) 1954.72,1425.2 2460.63,1425.2 2547.24,1511.81 2582.68,1511.81 v1(2588.58,1517.72) ; v1(2913.39,1757.87) 2919.29,1763.78 2919.29,2177.17 3019.69,2277.56 3039.37,2297.55 3053.15,2297.55 3058.16,2302.56 U33.136@3075.2,2302.56
  Bottom w3.94: v1(1838.58,1133.86) 1844.49,1127.95 1856.3,1127.95 1868.11,1139.76 1868.11,1370.08 1923.23,1425.2 1942.91,1425.2 v1(1948.82,1431.1) ; v1(2588.58,1517.72) 2594.49,1511.81 2637.8,1511.81 2877.95,1751.97 2907.48,1751.97 v1(2913.39,1757.87)
MIPI_DSI_TX0_CLKN/LVDS_TX0_CLKN: LCD1.18 U33.169 | length 3040.7
  Top w3.94: LCD1.18@1066.93,3219.5 v1(1066.93,3265.75) ; v1(2958.66,3074.8) 2952.76,3068.9 2952.76,3009.17 2963.89,2998.03 3230.31,2998.03 3328.74,2899.61 3328.74,2669.29 3233.66,2574.21 3208.66,2574.21 3204.72,2570.28 U33.169@3179.13,2570.28
  Bottom w3.94: v1(1066.93,3265.75) 1074.8,3257.87 1074.8,3116.14 1145.67,3045.28 2938.98,3045.28 2952.76,3059.06 2952.76,3068.9 v1(2958.66,3074.8)
MIPI_DSI_TX0_CLKP/LVDS_TX0_CLKP: LCD1.17 U33.171 | length 3030
  Top w3.94: LCD1.17@1055.12,3332.68 1055.12,3297.24 v1(1066.93,3285.43) ; v1(2938.98,3074.8) 2944.88,3068.9 2944.88,3005.91 2960.63,2990.16 3227.05,2990.16 3320.87,2896.34 3320.87,2672.55 3230.4,2582.09 3208.66,2582.09 3204.72,2586.02 U33.171@3179.13,2586.02
  Bottom w3.94: v1(1066.93,3285.43) 1082.68,3269.68 1082.68,3119.4 1148.93,3053.15 2935.04,3053.15 2944.88,3062.99 2944.88,3068.9 v1(2938.98,3074.8)
MIPI_DSI_TX0_D0N/LVDS_TX0_D0N: LCD1.21 U33.157 | length 3147.2
  Top w3.94: v1(1102.36,3285.43) LCD1.21@1102.36,3332.68 ; v1(3019.69,3062.99) 3025.59,3057.09 3250,3057.09 3375.98,2931.1 3375.98,2627.95 3227.76,2479.72 3208.66,2479.72 3204.72,2475.79 U33.157@3179.13,2475.79
  Bottom w3.94: v1(1102.36,3285.43) 1116.14,3271.65 1116.14,3123.34 1162.71,3076.77 2898.31,3076.77 2918,3096.46 2978.35,3096.46 2992.13,3082.68 2992.13,3068.22 3003.26,3057.09 3013.78,3057.09 v1(3019.69,3062.99)
MIPI_DSI_TX0_D0P/LVDS_TX0_D0P: LCD1.20 U33.159 | length 3115.1
  Top w3.94: LCD1.20@1090.55,3219.5 1090.55,3253.94 v1(1102.36,3265.75) ; v1(3019.69,3043.31) 3025.59,3049.21 3246.74,3049.21 3368.11,2927.84 3368.11,2631.21 3224.49,2487.6 3208.66,2487.6 3204.72,2491.54 U33.159@3179.13,2491.54
  Bottom w3.94: v1(1102.36,3265.75) 1108.27,3259.84 1108.27,3120.08 1159.45,3068.9 2901.57,3068.9 2921.26,3088.58 2975.09,3088.58 2984.25,3079.42 2984.25,3064.96 3000,3049.21 3013.78,3049.21 v1(3019.69,3043.31)
MIPI_DSI_TX0_D1N/LVDS_TX0_D1N: LCD1.15 U33.163 | length 3144.9
  Top w3.94: v1(1031.5,3285.43) LCD1.15@1031.49,3332.68 ; v1(2966.54,3035.43) 2972.44,3029.53 3238.19,3029.53 3352.36,2915.35 3352.36,2647.64 3231.69,2526.97 3208.66,2526.97 3204.72,2523.03 U33.163@3179.13,2523.03
  Bottom w3.94: v1(1031.5,3285.43) 1045.28,3271.65 1045.28,3056.41 1072.16,3029.53 2960.63,3029.53 v1(2966.54,3035.43)
MIPI_DSI_TX0_D1P/LVDS_TX0_D1P: LCD1.14 U33.165 | length 3112.8
  Top w3.94: LCD1.14@1019.68,3219.5 1019.68,3253.94 v1(1031.5,3265.75) ; v1(2966.54,3015.75) 2972.44,3021.65 3234.93,3021.65 3344.49,2912.09 3344.49,2650.9 3228.43,2534.84 3208.66,2534.84 3204.72,2538.78 U33.165@3179.13,2538.78
  Bottom w3.94: v1(1031.5,3265.75) 1037.4,3259.84 1037.4,3053.15 1068.9,3021.65 2960.63,3021.65 v1(2966.54,3015.75)
MIPI_DSI_TX0_D2N/LVDS_TX0_D2N: J24.3 LCD1.12 | length 3707.8
  Top w3.94: LCD1.12@996.06,3219.5 v1(996.06,3265.75) ; v1(4127.95,2988.19) 4133.86,2994.09 4155.51,2994.09 4166.73,3005.31 4166.73,3187.01 4170.67,3190.94 J24.3@4170.67,3216.14
  Bottom w3.94: v1(996.06,3265.75) 1001.97,3259.84 1001.97,3023.62 1039.37,2986.22 3832.68,2986.22 3851.69,2986.22 3873.34,3007.87 4070.87,3007.87 4084.65,2994.09 4122.05,2994.09 v1(4127.95,2988.19)
MIPI_DSI_TX0_D2P/LVDS_TX0_D2P: J24.5 LCD1.11 | length 3712.9
  Top w3.94: LCD1.11@984.25,3332.68 984.25,3297.24 v1(996.06,3285.43) ; v1(4127.95,3007.87) 4133.86,3001.97 4151.57,3001.97 4158.86,3009.25 4158.86,3187.01 4154.92,3190.94 J24.5@4154.92,3216.14
  Bottom w3.94: v1(996.06,3285.43) 1009.84,3271.65 1009.84,3026.88 1042.63,2994.09 3848.43,2994.09 3870.08,3015.75 4041.34,3015.75 4074.13,3015.75 4087.91,3001.97 4120.08,3001.97 4127.95,3009.84 v1(4127.95,3007.87)
MIPI_DSI_TX0_D3N/LVDS_TX0_D3N: J24.9 LCD1.24 | length 3434.9
  Top w3.94: LCD1.24@1137.79,3219.5 v1(1137.8,3265.75) ; J24.9@4123.43,3216.14 4123.43,3190.94 4119.49,3187.01 4119.49,3053.15 4120.08,3053.15 v1(4125.98,3047.24)
  Bottom w3.94: v1(1137.8,3265.75) 1143.7,3259.84 1143.7,3125.98 1177.17,3092.52 2889.76,3092.52 2909.45,3112.2 2990.83,3112.2 3093.2,3009.84 3791.34,3009.84 3835.94,3009.84 3855.62,3029.53 4086.61,3029.53 4092.52,3023.62 4112.2,3023.62 4120.08,3031.5 4120.08,3041.34 v1(4125.98,3047.24)
MIPI_DSI_TX0_D3P/LVDS_TX0_D3P: J24.11 LCD1.23 | length 3436.4
  Top w3.94: LCD1.23@1125.98,3332.68 1125.98,3297.24 v1(1137.8,3285.43) ; v1(4106.3,3047.24) 4106.3,3047.83 4111.61,3053.15 4111.61,3187.01 4107.68,3190.94 J24.11@4107.68,3216.14
  Bottom w3.94: v1(1137.8,3285.43) 1151.57,3271.65 1151.57,3129.25 1180.43,3100.39 2886.5,3100.39 2906.19,3120.08 2994.09,3120.08 3096.46,3017.72 3832.68,3017.72 3852.36,3037.4 4082.68,3037.4 4089.88,3037.4 4095.78,3031.5 4108.27,3031.5 4112.2,3035.43 4112.2,3041.34 v1(4106.3,3047.24)
MIPI_DSI_TX1_CLKN: U33.187 U90074.13 | length 1892.7
  Top w3.94: v1(1925.2,3291.34) U90074.13@1925.2,3336.61 ; v1(2771.65,3188.98) 2777.56,3183.07 2852.36,3183.07 2870.08,3165.35 2870.08,2973.73 2928.46,2915.35 3174.86,2915.35 3255.91,2834.31 3255.91,2744.09 3226.38,2715.94 3208.66,2715.94 3204.72,2712.01 U33.187@3179.13,2712.01
  Bottom w3.94: v1(1925.2,3291.34) 1938.98,3277.56 1938.98,3225.7 1981.61,3183.07 2765.75,3183.07 v1(2771.65,3188.98)
MIPI_DSI_TX1_CLKP: U33.189 U90074.14 | length 1864.5
  Top w3.94: U90074.14@1913.39,3223.43 1913.39,3259.84 v1(1925.2,3271.65) ; v1(2771.65,3169.29) 2777.56,3175.2 2849.1,3175.2 2862.2,3162.09 2862.2,2970.47 2925.2,2907.48 3171.6,2907.48 3248.03,2831.05 3248.03,2747.57 3223.12,2723.82 3208.66,2723.82 3204.72,2727.76 U33.189@3179.13,2727.76
  Bottom w3.94: v1(1925.2,3271.65) 1931.1,3265.75 1931.1,3222.44 1978.35,3175.2 2765.75,3175.2 v1(2771.65,3169.29)
MIPI_DSI_TX1_D0N: U33.175 U90074.7 | length 2032.6
  Top w3.94: v1(1996.06,3291.34) U90074.7@1996.06,3336.61 ; v1(2824.8,3253.94) 2830.71,3248.03 2889.76,3248.03 2925.2,3212.6 2925.2,2993.76 2948.48,2970.47 3212.26,2970.47 3303.15,2879.58 3303.15,2876.32 3303.15,2683.41 3241.2,2621.46 3208.66,2621.46 3204.72,2617.52 U33.175@3179.13,2617.52
  Bottom w3.94: v1(1996.06,3291.34) 2009.84,3277.56 2009.84,3247.36 2022.95,3234.25 2781.5,3234.25 2795.28,3248.03 2818.9,3248.03 v1(2824.8,3253.94)
MIPI_DSI_TX1_D0P: U33.177 U90074.8 | length 2004
  Top w3.94: U90074.8@1984.25,3223.43 1984.25,3259.84 v1(1996.06,3271.65) ; v1(2824.8,3234.25) 2830.71,3240.16 2885.83,3240.16 2917.32,3208.66 2917.32,2990.5 2945.22,2962.6 3209,2962.6 3295.28,2876.32 3295.28,2686.67 3237.94,2629.33 3208.66,2629.33 3204.72,2633.27 U33.177@3179.13,2633.27
  Bottom w3.94: v1(1996.06,3271.65) 2001.97,3265.75 2001.97,3244.09 2019.69,3226.38 2649.61,3226.38 2784.76,3226.38 2798.54,3240.16 2818.9,3240.16 v1(2824.8,3234.25)
MIPI_DSI_TX1_D1N: U33.181 U90074.10 | length 1983.6
  Top w3.94: U90074.10@1960.63,3223.43 v1(1960.63,3271.65) ; v1(2875.98,3226.38) 2870.08,3220.47 2870.08,3206.69 2897.64,3179.13 2897.64,2981.61 2936.33,2942.91 3192.58,2942.91 3279.53,2855.96 3279.53,2712.6 3236.22,2668.7 3208.66,2668.7 3204.72,2664.76 U33.181@3179.13,2664.76
  Bottom w3.94: v1(1960.63,3271.65) 1966.54,3265.75 1966.54,3232.28 1996.06,3202.76 2862.2,3202.76 2870.08,3210.63 2870.08,3220.47 v1(2875.98,3226.38)
MIPI_DSI_TX1_D1P: U33.183 U90074.11 | length 1968.9
  Top w3.94: U90074.11@1948.82,3336.61 1948.82,3303.15 v1(1960.63,3291.34) ; v1(2856.3,3226.38) 2862.2,3220.47 2862.2,3208.66 2862.2,3203.43 2889.76,3175.87 2889.76,2978.35 2933.07,2935.04 3189.31,2935.04 3271.65,2852.7 3271.65,2715.86 3232.9,2676.57 3208.66,2676.57 3204.72,2680.51 U33.183@3179.13,2680.51
  Bottom w3.94: v1(1960.63,3291.34) 1974.41,3277.56 1974.41,3235.54 1999.32,3210.63 2858.27,3210.63 2862.2,3214.57 2862.2,3220.47 v1(2856.3,3226.38)
MIPI_DSI_TX1_D2N: U33.193 U90074.16 | length 1868.2
  Top w3.94: U90074.16@1889.76,3223.43 v1(1889.76,3271.65) ; v1(2836.61,3161.42) 2830.71,3155.51 2830.71,3141.06 2842.52,3129.25 2842.52,2961.92 2916.65,2887.8 3166.99,2887.8 3232.28,2822.5 3232.28,2777.34 3218.13,2763.19 3207.48,2763.19 3203.54,2759.25 U33.193@3179.13,2759.25
  Bottom w3.94: v1(1889.76,3271.65) 1895.67,3265.75 1895.67,3198.82 1942.91,3151.57 2746.06,3151.57 2761.81,3135.83 2822.83,3135.83 2830.71,3143.7 2830.71,3155.51 v1(2836.61,3161.42)
MIPI_DSI_TX1_D2P: U33.195 U90074.17 | length 1853.2
  Top w3.94: U90074.17@1877.95,3336.61 1877.95,3303.15 v1(1889.76,3291.34) ; v1(2816.93,3161.42) 2822.83,3155.51 2822.83,3137.8 2834.65,3125.98 2834.65,2958.66 2913.39,2879.92 3163.72,2879.92 3224.41,2819.24 3224.41,2780.6 3214.87,2771.06 3207.48,2771.06 3203.54,2775 U33.195@3179.13,2775
  Bottom w3.94: v1(1889.76,3291.34) 1903.54,3277.56 1903.54,3202.76 1946.85,3159.45 2746.06,3159.45 2749.32,3159.45 2765.07,3143.7 2818.9,3143.7 2822.83,3147.64 2822.83,3155.51 v1(2816.93,3161.42)
MIPI_DSI_TX1_D3N: U33.194 U90074.19 | length 1776.3
  Top w3.94: v1(1854.33,3291.34) U90074.19@1854.33,3336.61 ; v1(2738.19,3133.86) 2744.09,3127.95 2775.59,3127.95 2788.69,3127.95 2814.96,3101.69 2814.96,2954.05 2908.77,2860.24 3113.84,2860.24 3133.86,2840.21 3133.86,2777.31 3119.74,2763.19 3104.33,2763.19 3100.39,2759.25 U33.194@3075.2,2759.25
  Bottom w3.94: v1(1854.33,3291.34) 1868.11,3277.56 1868.11,3202.08 1934.36,3135.83 2663.39,3135.83 2702.08,3135.83 2709.95,3127.95 2732.28,3127.95 v1(2738.19,3133.86)
MIPI_DSI_TX1_D3P: U33.196 U90074.20 | length 1748.1
  Top w3.94: U90074.20@1842.52,3223.43 1842.52,3259.84 v1(1854.33,3271.65) ; v1(2738.19,3114.17) 2744.09,3120.08 2785.43,3120.08 2807.09,3098.42 2807.09,2950.79 2905.51,2852.36 3110.57,2852.36 3125.98,2836.95 3125.98,2780.57 3116.48,2771.06 3104.33,2771.06 3100.39,2775 U33.196@3075.2,2775
  Bottom w3.94: v1(1854.33,3271.65) 1860.24,3265.75 1860.24,3198.82 1931.1,3127.95 2698.82,3127.95 2706.69,3120.08 2732.28,3120.08 v1(2738.19,3114.17)
MIPI_LCD_BL_1: J24.36 R57.1 | length 4587.6
  Top w3.94: R57.1@852.36,2675.2 852.36,2606.3 862.2,2596.46 2441.12,2596.46 2456.69,2612.03 2456.69,2667.32 v1(2470.47,2681.1) ; J24.36@3918.7,3320.08 3918.7,3357.68 v1(3919.29,3358.27) ; v1(3950.79,2761.81) 3960.63,2771.65 4101.8,2771.65 4261.81,2931.66 4261.81,3269.68 v1(4275.59,3283.46)
  Bottom w3.94: v1(2470.47,2681.1) 2456.69,2667.32 2456.69,2625.87 2509.73,2572.83 3236.34,2572.83 3376.1,2712.6 3789.37,2712.6 3824.8,2748.03 3937.01,2748.03 v1(3950.79,2761.81) ; v1(3919.29,3358.27) 3940.94,3336.61 4238.19,3336.61 4253.94,3320.87 4253.94,3305.12 v1(4275.59,3283.46)
MIPI_LCD_BL_2: J24.93 R193.1 | length 2187
  Top w3.94: R193.1@2009.84,2657.48 2023.62,2643.7 2366.14,2643.7 2374.02,2651.57 2374.02,2667.32 v1(2387.8,2681.1) ; v1(3425.2,2647.64) 3425.2,2765.75 3438.98,2779.53 3438.98,3150.2 3462.01,3173.23 J24.93@3462.01,3216.14
  Bottom w3.94: v1(2387.8,2681.1) 2374.02,2667.32 2374.02,2641.73 2490.16,2525.59 3255.91,2525.59 3377.95,2647.64 v1(3425.2,2647.64)
MIPI_LCD_EN_1: J24.18 R69.1 | length 4452.8
  Top w3.94: R69.1@1003.94,2773.62 982.28,2751.97 982.28,2649.61 1007.87,2624.02 1133.86,2624.02 1153.54,2604.33 2401.57,2604.33 2442.91,2645.67 v1(2442.91,2653.54) ; v1(4013.78,2726.38) 4112.2,2726.38 4312.99,2927.17 4312.99,3348.43 4287.4,3374.02 4070.28,3374.02 4060.43,3364.17 J24.18@4060.43,3320.08
  Bottom w3.94: v1(2442.91,2653.54) 2442.91,2628.51 2506.47,2564.96 3239.6,2564.96 3379.36,2704.72 3795.28,2704.72 3830.71,2740.16 4000,2740.16 v1(4013.78,2726.38)
MIPI_LCD_EN_2: J24.20 R204.1 | length 2542.3
  Top w3.94: v1(2311.02,3322.83) 2336.61,3297.24 2336.61,2944.88 2358.27,2923.23 R204.1@2358.27,2903.54 ; v1(2998.03,3253.94) 2998.03,3210.57 3078.68,3129.92 3220.47,3129.92 3277.56,3187.01 3277.56,3362.2 3289.37,3374.02 4036.81,3374.02 4044.69,3366.14 J24.20@4044.69,3320.08
  Bottom w3.94: v1(2311.02,3322.83) 2324.8,3336.61 2915.35,3336.61 v1(2998.03,3253.94)
MIPI_RESET_1: J24.83 R59.2 | length 2505.5
  Top w3.94: R59.2@1354.33,3307.09 v1(1372.05,3307.09) ; v1(2992.13,3340.55) 2964.57,3312.99 2964.57,3200.79 3059.06,3106.3 3263.78,3106.3 v1(3269.69,3100.39) ; J24.83@3540.75,3216.14 3541.34,3215.55 v1(3541.34,3185.04)
  Bottom w3.94: v1(1372.05,3307.09) 1427.17,3362.2 2970.47,3362.2 v1(2992.13,3340.55) ; v1(3269.69,3100.39) 3350.39,3181.1 3537.4,3181.1 v1(3541.34,3185.04)
MIPI_RESET_2: J24.79 R194.1 | length 2327.7
  Top w3.94: R194.1@2080.71,3153.54 2220.47,3153.54 2230.31,3143.7 2230.31,2948.82 2236.22,2942.91 2314.96,2942.91 2322.83,2950.79 2322.83,3289.37 v1(2311.02,3301.18) ; v1(2998.03,3281.5) 2984.25,3267.72 2984.25,3213.22 3075.42,3122.05 3312.99,3122.05 v1(3322.83,3131.89) ; J24.79@3572.24,3216.14 3572.83,3215.55 v1(3572.83,3185.04)
  Bottom w3.94: v1(2311.02,3301.18) 2297.24,3314.96 2297.24,3330.71 2311.02,3344.49 2935.04,3344.49 v1(2998.03,3281.5) ; v1(3322.83,3131.89) 3362.2,3171.26 3559.06,3171.26 v1(3572.83,3185.04)
N17781029: LED3.1 R175.2 R178.2 | length 140.4
  Top w19.68: LED3.1@1154.78,-94.43 1155.51,-94.43 R175.2@1155.51,3.94 R178.2@1196.85,3.94
N17781033: LED4.1 R180.2 | length 120.1
  Top w19.68: R180.2@1279.53,3.94 1279.53,-23.62 1331.95,-76.04 LED4.1@1331.95,-94.43
N17781361: LED3.2 R173.1 R174.1 R179.1 | length 280.5
  Top w3.94: LED3.2@1223.17,-94.54 1224.41,-93.31 1224.41,-57.09 1238.19,-43.31 R174.1@1238.19,3.94
  Top w7.87: R173.1@1155.51,106.3 R179.1@1196.85,106.3 1212.6,106.3 1216.54,102.36 1216.54,15.75 1228.35,3.94 R174.1@1238.19,3.94
N17782008: LED4.2 R181.1 R182.1 R183.1 | length 182.5
  Top w19.68: R181.1@1320.87,3.94 R183.1@1362.2,3.94 R182.1@1403.54,3.94 1400.34,0.73 LED4.2@1400.34,-94.54
N17782924: R172.1 R176.1 R177.1 U30.13 | length 173.5
  Top w19.68: U30.13@2093.31,2175.98 2110.24,2192.91 R177.1@2185.04,2192.91 R176.1@2185.04,2230.31 R172.1@2185.04,2267.72
N17810979: J6.A1 R20.1 | length 162.1
  Top w19.68: 5812.2,1529.53 5812.2,1506.69 R20.1@5812.99,1505.91
  Top w51.18: 5812.2,1529.53 J6.A1@5812.2,1667.72
N17813907: C19.1 R14.2 R17.1 U7.4 | length 147.6
  Top w15.75: R14.2@5370.08,1553.15 C19.1@5409.45,1553.15 R17.1@5448.82,1553.15 U7.4@5448.82,1622.05
N17813952: C9.2 L1.1 U7.6 | length 189
  Top w19.68: C9.2@5291.34,1728.35 5448.82,1728.35 U7.6@5448.82,1696.85